# EAGLE board pcb (EAGLE 9.7.0)
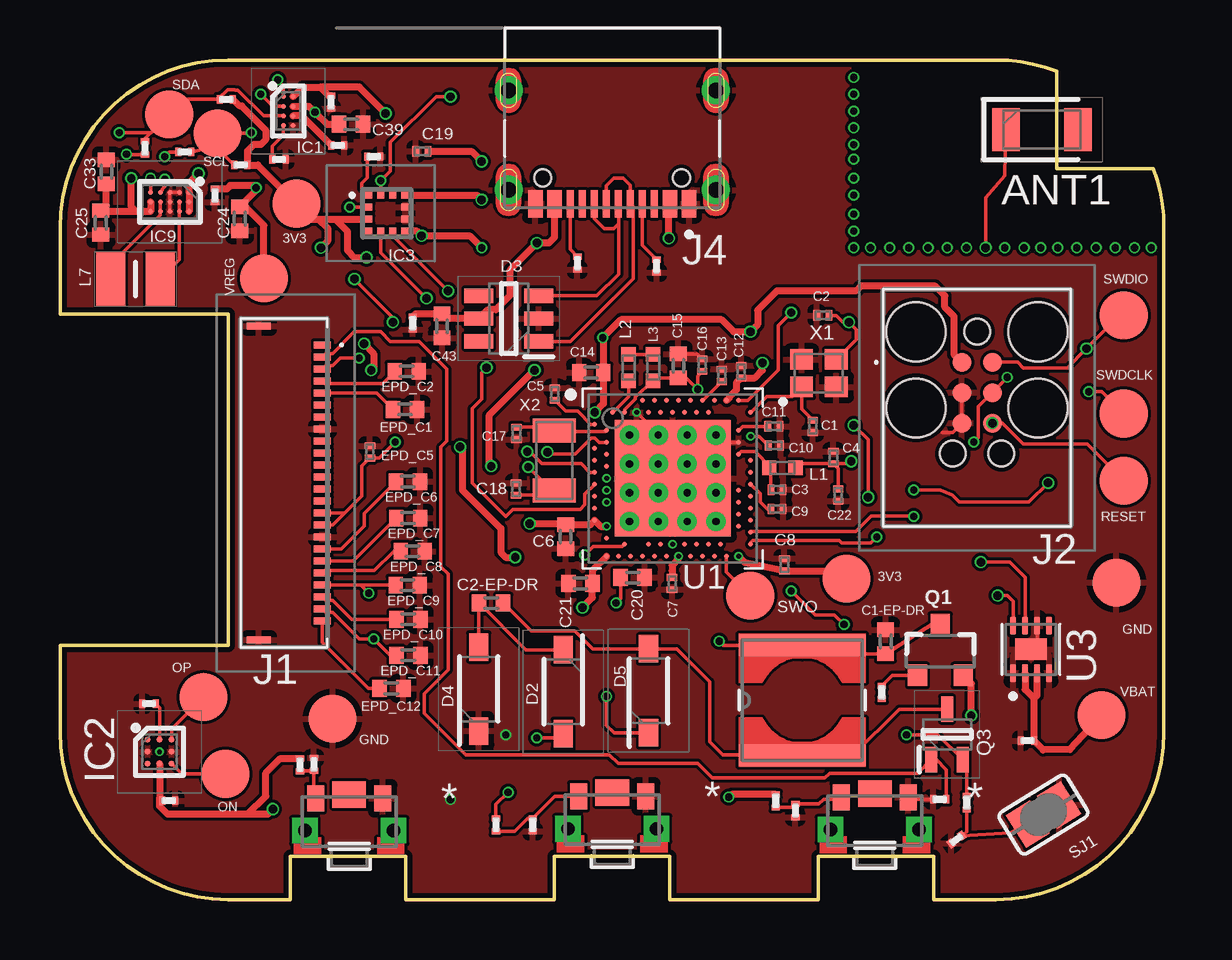
[diagram p0: board, top side]
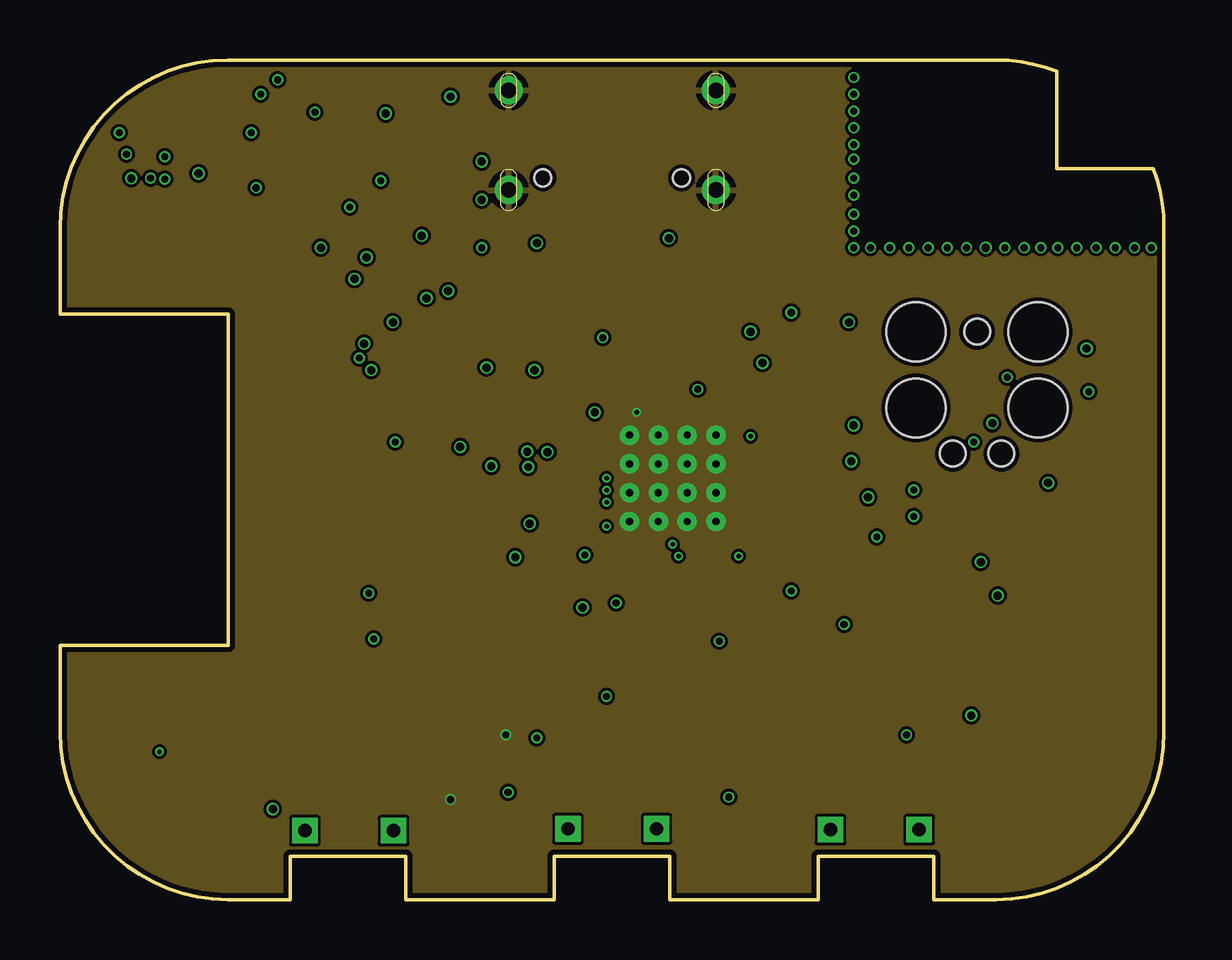
[diagram p1: board, inner layer Route2]
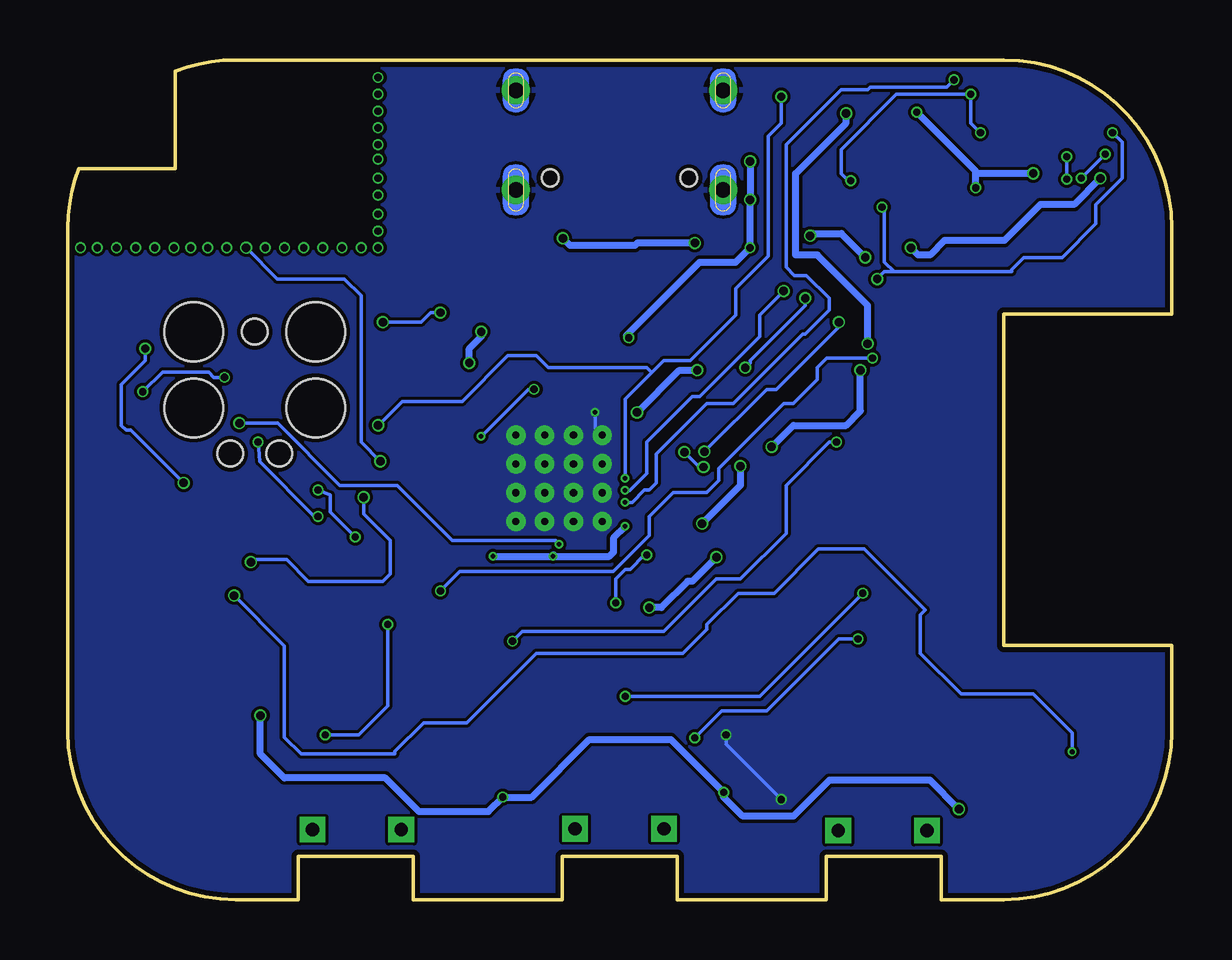
[diagram p2: board, bottom side, seen from below]

Size 46 x 35 mm. Coordinates in mm from the lower left corner, seen from the top.
Outline: 39,0 36.4,0 36.4,1.8 31.6,1.8 31.6,0 25.4,0 25.4,1.8 20.6,1.8 20.6,0 14.4,0 14.4,1.8 9.6,1.8 9.6,0 7,0 arc-90 0,7 0,10.6 7,10.6 7,24.4 0,24.4 0,28 arc-90 7,35 39,35 arc-21 41.52,34.53 41.52,30.47 45.55,30.48 arc-21 46,28 46,7 arc-90 39,0
Copper layers (1*16): Top 0.035mm / dielectric 1.6mm / Bottom 0.035mm
Design rules "jlcpcb-2layers.dru *": minimum track width 5mil, minimum drill 0.3mm, track to track 5mil, track to pad 5mil, pad to pad 5mil, via to via 5mil, smd to smd 5mil, copper to edge 0.2mm, drill to drill 6mil, minimum pad ring 10mil, minimum via ring 3mil, stop-mask expansion 4mil, vias tented up to drill 0mil, thermal gap 10mil
Net classes: 0 default: width 0.15 mm; 1 POWER: width 0.15 mm

## Footprints (pad centres in the part's own frame; a part is rotated, then mirrored left to right if it is on the bottom)
2450AT18B100E_ANTC3216X140N = smd 1.15 x 1.8: 1 -1.5,0; 2 1.5,0
NORDIC_NRF_3_RESC0201_L = smd 0.28 x 0.43: 1 -0.255,0; 2 0.255,0
PERFECT_0402_0402 = smd 0.6 x 0.7: 1 -0.5,0; 2 0.5,0
ERA-1AEB3401C_0201 = smd 0.35 x 0.25: 1 0,0.275; 2 0,-0.275
ESP32_C6_LIBRARY_5_SOD3716X135N = smd 1.15 x 0.8: 1 -1.75,0; 2 1.75,0
ESP32_C6_LIBRARY_3_SOT95P280X145-6N = smd 1.2 x 0.6: 1 -1.25,0.95; 2 -1.25,0; 3 -1.25,-0.95; 4 1.25,-0.95; 5 1.25,0; 6 1.25,0.95
BQ25180YBGR_BGA8C40P2X4_100X155X50 = smd 0.2 x 0.2: A1 -0.2,0.6; A2 0.2,0.6; B1 -0.2,0.2; B2 0.2,0.2; C1 -0.2,-0.2; C2 0.2,-0.2; D1 -0.2,-0.6; D2 0.2,-0.6
DRV2605YZFR_BGA9C50P3X3_144X144X62 = smd 0.25 x 0.25: A1 -0.5,0.5; A2 0,0.5; A3 0.5,0.5; B1 -0.5,0; B2 0,0; B3 0.5,0; C1 -0.5,-0.5; C2 0,-0.5; C3 0.5,-0.5
BMA423_BMA423 = smd 0.3 x 0.35: 1 -0.75,-0.775; 2 -0.25,-0.775; 3 0.25,-0.775; 4 0.75,-0.775; 7 0.75,0.775; 8 0.25,0.775; 9 -0.25,0.775; 10 -0.75,0.775 | smd 0.35 x 0.3: 5 0.775,-0.25; 6 0.775,0.25; 11 -0.775,0.25; 12 -0.775,-0.25
RT6160AWSC_BGA15C40P3X5_140X230X60 = smd 0.216 x 0.216: A1 -0.4,0.8; A2 0,0.8; A3 0.4,0.8; B1 -0.4,0.4; B2 0,0.4; B3 0.4,0.4; C1 -0.4,0; C2 0,0; C3 0.4,0; D1 -0.4,-0.4; D2 0,-0.4; D3 0.4,-0.4; E1 -0.4,-0.8; E2 0,-0.8; E3 0.4,-0.8
503480-2400_5034802400 = smd 0.3 x 0.7: 1 -5.75,1.525; 2 -5.25,1.525; 3 -4.75,1.525; 4 -4.25,1.525; 5 -3.75,1.525; 6 -3.25,1.525; 7 -2.75,1.525; 8 -2.25,1.525; 9 -1.75,1.525; 10 -1.25,1.525; 11 -0.75,1.525; 12 -0.25,1.525; 13 0.25,1.525; 14 0.75,1.525; 15 1.25,1.525; 16 1.75,1.525; 17 2.25,1.525; 18 2.75,1.525; 19 3.25,1.525; 20 3.75,1.525; 21 4.25,1.525; 22 4.75,1.525; 23 5.25,1.525; 24 5.75,1.525 | smd 0.3 x 1: MP1 -6.54,-1.125; MP2 6.54,-1.125
TC2030-IDC_TC2030IDC = smd 0.783 x 0.783: 1 -0.953,-0.635; 2 -0.953,0.635; 3 0.317,-0.635; 4 0.317,0.635; 5 1.588,-0.635; 6 1.588,0.635 | hole 2.451: -2.223,-2.54; -2.223,2.54; 0.952,-2.54; 0.952,2.54 | hole 1.067: -2.223,0; 2.857,-1.016; 2.857,1.016
KH-TYPE-C-16P_KINGHELM_KH-TYPE-C-16P = smd 0.6 x 1.15: A1_B12 -3.2,4.725; A4_B9 -2.4,4.725; A9_B4 2.4,4.725; A12_B1 3.2,4.725 | smd 0.3 x 1.15: A5 -1.25,4.725; A6 -0.25,4.725; A7 0.25,4.725; A8 1.25,4.725; B5 1.75,4.725; B6 0.75,4.725; B7 -0.75,4.725; B8 -1.75,4.725 | drill 0.65 pad 1.05: SH1 -4.32,0; SH2 4.32,0; SH3 -4.32,4.15; SH4 4.32,4.15 | hole 0.7: -2.89,3.65; 2.89,3.65
NORDIC_NRF_2_RESC0402_N = smd 0.6 x 0.6: 1 -0.55,0; 2 0.55,0
ESP32_C6_LIBRARY_2_IND_4828-WE-TPC_WRE = smd 0.9 x 5.3: 1 -2.286,0; 2 2.286,0
MLP2016SR47MT0S1_INDC2016X100N = smd 1.2 x 2.2: 1 -1.028,0; 2 1.028,0
ESP32_C6_LIBRARY_4_ESP32_C6_LIBRARY_4_ESP32_C6_LIBRARY_4_ESP32_C6_LIBRARY_4_ESP32_WROVER_SPARKFUN-DISCRETESEMI_SOT23-3 = smd 0.8 x 0.9: 1 -0.95,-1; 2 0.95,-1; 3 0,1.1
ESP32_C6_LIBRARY_6_SOT65P210X110-3N = smd 1.05 x 0.5: 1 -1.05,0.65; 2 -1.05,-0.65; 3 1.05,0
CPF0201D7K68C1_0201 = smd 0.35 x 0.25: 1 0,0.275; 2 0,-0.275
ESP32_C6_LIBRARY_7_JUMPER_SJ = smd 1.168 x 1.6: 1 -0.762,0; 2 0.762,0
2025-10-22_07-23-44_LIBRARY_SW_EVP-AKE31A_PAN = smd 0.711 x 1.092: 1 -1.4,-0.972; 2 1.4,-0.972 | drill 0.559 pad 0.914 square: 3 -1.848,0.381; 4 1.848,0.381 | smd 1.397 x 1.092: 5 0,-1.124
HECTOR_WATCH_1_TP20R = smd 2 x 2: TP 0,0
NORDIC_NRF_4_AQFN50P700X700X85_HS-74N = smd 4.85 x 4.85: P$74 0,0 | drill 0.3 pad 0.6: P$75 -1.8,1.8; P$76 -0.6,1.8; P$77 0.6,1.8; P$78 1.8,1.8; P$79 -1.8,0.6; P$80 -0.6,0.6; P$81 0.6,0.6; P$82 1.8,0.6; P$83 -1.8,-0.6; P$84 -0.6,-0.6; P$85 0.6,-0.6; P$86 1.8,-0.6; P$87 -1.8,-1.8; P$88 -0.6,-1.8; P$89 0.6,-1.8; P$90 1.8,-1.8 | smd 0.2 x 0.2: P$A8 -1.25,3.25; P$A10 -0.75,3.25; P$A12 -0.25,3.25; P$A14 0.25,3.25; P$A16 0.75,3.25; P$A18 1.25,3.25; P$A20 1.75,3.25; P$A22 2.25,3.25; P$A23 2.75,3.25; P$AA24 3.25,-2.25; P$AB2 -2.75,-2.5; P$AC5 -2,-2.75; P$AC9 -1,-2.75; P$AC11 -0.5,-2.75; P$AC13 0,-2.75; P$AC15 0.5,-2.75; P$AC17 1,-2.75; P$AC19 1.5,-2.75; P$AC21 2,-2.75; P$AC24 3.25,-2.75; P$AD2 -2.75,-3.25; P$AD4 -2.25,-3.25; P$AD6 -1.75,-3.25; P$AD8 -1.25,-3.25; P$AD10 -0.75,-3.25; P$AD12 -0.25,-3.25; P$AD14 0.25,-3.25; P$AD16 0.75,-3.25; P$AD18 1.25,-3.25; P$AD20 1.75,-3.25; P$AD22 2.25,-3.25; P$AD23 2.75,-3.25; P$B1 -3.25,2.75; P$B3 -2.5,2.75; P$B5 -2,2.75; P$B7 -1.5,2.75; P$B9 -1,2.75; P$B11 -0.5,2.75; P$B13 0,2.75; P$B15 0.5,2.75; P$B17 1,2.75; P$B19 1.5,2.75; P$B24 3.25,2.75; P$C1 -3.25,2.25; P$D2 -2.75,2; P$D23 2.75,2; P$E24 3.25,1.75; P$F2 -2.75,1.5; P$F23 2.75,1.5; P$G1 -3.25,1.25; P$H2 -2.75,1; P$H23 2.75,1; P$J1 -3.25,0.75; P$J24 3.25,0.75; P$K2 -2.75,0.5; P$L1 -3.25,0.25; P$L24 3.25,0.25; P$M2 -2.75,0; P$N1 -3.25,-0.25; P$N24 3.25,-0.25; P$P2 -2.75,-0.5; P$P23 2.75,-0.5; P$R1 -3.25,-0.75; P$R24 3.25,-0.75; P$T2 -2.75,-1; P$T23 2.75,-1; P$U1 -3.25,-1.25; P$U24 3.25,-1.25; P$V23 2.75,-1.5; P$W1 -3.25,-1.75; P$W24 3.25,-1.75; P$Y2 -2.75,-2; P$Y23 2.75,-2
ESP32_C6_LIBRARY_SON50P200X200X80-9N = smd 0.76 x 0.27: 1 -0.985,0.75; 2 -0.985,0.25; 3 -0.985,-0.25; 4 -0.985,-0.75; 5 0.985,-0.75; 6 0.985,-0.25; 7 0.985,0.25; 8 0.985,0.75 | smd 0.9 x 1.3: 9 0,0
NORDIC_NRF_BT-XTAL_2016_N = smd 0.95 x 0.85: 1 -0.725,-0.575; 2 0.725,-0.575; 3 0.725,0.575; 4 -0.725,0.575
NORDIC_NRF_1_XTAL_3215_N = smd 1 x 1.8: 1 -1.25,0; 2 1.25,0

## Placement (x,y rotation side)
ANT1  2450AT18B100E  [2450AT18B100E_ANTC3216X140N]  40.91,32.1 0 top
C1  12pF  [NORDIC_NRF_3_RESC0201_L]  31.37,19.73 270 top
C1-EP-DR  10uF  [PERFECT_0402_0402]  34.4,10.75 90 top
C2  12pF  [NORDIC_NRF_3_RESC0201_L]  31.79,24.35 180 top
C2-EP-DR  4.7uF/25V  [PERFECT_0402_0402]  17.96,12.36 0 top
C3  1pF  [NORDIC_NRF_3_RESC0201_L]  29.87,17.09 0 top
C4  1pF  [NORDIC_NRF_3_RESC0201_L]  32.23,18.43 90 top
C5  100nF  [NORDIC_NRF_3_RESC0201_L]  20.61,21.07 90 top
C6  4.7µF  [PERFECT_0402_0402]  21.07,15.13 270 top
C7  100nF  [NORDIC_NRF_3_RESC0201_L]  25.51,13.18 270 top
C8  100nF  [NORDIC_NRF_3_RESC0201_L]  30.18,13.95 90 top
C9  820pF  [NORDIC_NRF_3_RESC0201_L]  29.87,16.28 0 top
C10  N.C.  [NORDIC_NRF_3_RESC0201_L]  29.77,18.93 0 top
C11  100pF  [NORDIC_NRF_3_RESC0201_L]  29.74,19.73 0 top
C12  100nF  [NORDIC_NRF_3_RESC0201_L]  28.38,22 90 top
C13  N.C.  [NORDIC_NRF_3_RESC0201_L]  27.57,21.85 90 top
C14  4.7µF  [PERFECT_0402_0402]  22.14,21.97 180 top
C15  1.0µF  [PERFECT_0402_0402]  25.76,22.24 90 top
C16  47nF  [NORDIC_NRF_3_RESC0201_L]  26.76,22.28 90 top
C17  12pF  [NORDIC_NRF_3_RESC0201_L]  19.02,19.43 90 top
C18  12pF  [NORDIC_NRF_3_RESC0201_L]  19,17.11 270 top
C19  100nF  [NORDIC_NRF_3_RESC0201_L]  15.08,31.19 180 top
C20  4.7µF  [PERFECT_0402_0402]  23.86,13.42 0 top
C21  4.7µF  [PERFECT_0402_0402]  21.69,13.18 180 top
C22  N.C  [NORDIC_NRF_3_RESC0201_L]  32.43,16.86 270 top
C23  0.1uF  [ERA-1AEB3401C_0201]  6.45,29.36 180 top
C24  10uF  [PERFECT_0402_0402]  7.49,28.38 90 top
C25  22uF  [PERFECT_0402_0402]  1.7,28.22 270 top
C27  0.1uF  [ERA-1AEB3401C_0201]  40.31,6.62 90 top
C29  1uF  [ERA-1AEB3401C_0201]  10.58,5.63 0 top
C30  1uF  [ERA-1AEB3401C_0201]  19.7,3.11 180 top
C31  1uF  [ERA-1AEB3401C_0201]  30.64,3.71 180 top
C32  1uF  [ERA-1AEB3401C_0201]  3.71,8.16 90 top
C33  22uF  [PERFECT_0402_0402]  1.93,30.34 90 top
C34  0.1uF  [ERA-1AEB3401C_0201]  4.53,4.12 270 top
C37  1uF  [ERA-1AEB3401C_0201]  11.57,31.44 270 top
C38  1uF  [ERA-1AEB3401C_0201]  11.29,33.24 180 top
C39  10uF  [PERFECT_0402_0402]  12.13,32.32 0 top
C42  0.1uF  [ERA-1AEB3401C_0201]  14.7,24.03 0 top
C43  4.7uF  [PERFECT_0402_0402]  15.92,23.91 270 top
D2  MBR0530  [ESP32_C6_LIBRARY_5_SOD3716X135N]  20.96,8.67 270 top
D3  USBLC6-2SC6Y  [ESP32_C6_LIBRARY_3_SOT95P280X145-6N]  18.7,24.22 180 top
D4  MBR0530  [ESP32_C6_LIBRARY_5_SOD3716X135N]  17.45,8.77 90 top
D5  MBR0530  [ESP32_C6_LIBRARY_5_SOD3716X135N]  24.52,8.7 90 top
EPD_C1  1uF/50V  [PERFECT_0402_0402]  14.38,20.43 180 top
EPD_C2  1uF/50V  [PERFECT_0402_0402]  14.45,22.02 180 top
EPD_C5  0.1uF/50V  [NORDIC_NRF_3_RESC0201_L]  12.91,18.66 270 top
EPD_C6  1uF/50V  [PERFECT_0402_0402]  14.5,17.42 180 top
EPD_C7  1uF/50V  [PERFECT_0402_0402]  14.51,15.9 180 top
EPD_C8  1uF/50V  [PERFECT_0402_0402]  14.7,14.52 180 top
EPD_C9  1uF/50V  [PERFECT_0402_0402]  14.49,13.1 180 top
EPD_C10  1uF/50V  [PERFECT_0402_0402]  14.52,11.68 180 top
EPD_C11  1uF/50V  [PERFECT_0402_0402]  14.52,10.18 180 top
EPD_C12  1uF/50V  [PERFECT_0402_0402]  13.81,8.8 180 top
IC1  BQ25180YBGR  [BQ25180YBGR_BGA8C40P2X4_100X155X50]  9.51,32.87 0 top
IC2  DRV2605YZFR  [DRV2605YZFR_BGA9C50P3X3_144X144X62]  4.15,6.16 0 top
IC3  BMA423  [BMA423_BMA423]  13.62,28.61 270 top
IC9  RT6160AWSC  [RT6160AWSC_BGA15C40P3X5_140X230X60]  4.58,29.09 270 top
J1  503480-2400  [503480-2400_5034802400]  9.41,17.37 270 top
J2  TC2030-IDC  [TC2030-IDC_TC2030IDC]  38.21,21.44 270 top
J4  KH-TYPE-C-16P  [KH-TYPE-C-16P_KINGHELM_KH-TYPE-C-16P]  23.01,33.73 180 top
L1  3.9nH  [NORDIC_NRF_2_RESC0402_N]  30.1,18 0 top
L2  10µH  [NORDIC_NRF_2_RESC0402_N]  23.7,22.17 90 top
L3  15nH  [NORDIC_NRF_2_RESC0402_N]  24.71,22.17 270 top
L5  68uH  [ESP32_C6_LIBRARY_2_IND_4828-WE-TPC_WRE]  30.93,8.31 90 top
L7  MLP2016SR47MT0S1  [MLP2016SR47MT0S1_INDC2016X100N]  3.15,25.87 180 top
Q1  20V/4.2A/52mΩ/1.4W  [ESP32_C6_LIBRARY_4_ESP32_C6_LIBRARY_4_ESP32_C6_LIBRARY_4_ESP32_C6_LIBRARY_4_ESP32_WROVER_SPARKFUN-DISCRETESEMI_SOT23-3]  36.68,10.35 0 top
Q3  SI1308EDL-T1-GE3  [ESP32_C6_LIBRARY_6_SOT65P210X110-3N]  36.96,6.89 90 top
R1_EP_DR  0.47  [CPF0201D7K68C1_0201]  37.78,4.04 180 top
R1_USB  5K1  [CPF0201D7K68C1_0201]  24.86,26.41 180 top
R2  0  [ERA-1AEB3401C_0201]  3.54,31.33 0 top
R2_EP_DR  10K  [CPF0201D7K68C1_0201]  36.65,4.18 90 top
R2_USB  5K1  [CPF0201D7K68C1_0201]  21.56,26.53 0 top
R3  0  [CPF0201D7K68C1_0201]  13.07,30.97 270 top
R4  0  [ERA-1AEB3401C_0201]  5.2,31.16 270 top
R5  10k  [CPF0201D7K68C1_0201]  18.16,3.11 180 top
R7  10K  [CPF0201D7K68C1_0201]  10,5.61 180 top
R8  10K  [CPF0201D7K68C1_0201]  29.82,4.11 180 top
R9  10k  [ERA-1AEB3401C_0201]  9.13,30.85 270 top
R17  3K3  [ERA-1AEB3401C_0201]  7.53,30.62 270 top
R18  3K3  [ERA-1AEB3401C_0201]  6.93,33.36 270 top
R_PWR_EPD  10K  [CPF0201D7K68C1_0201]  34.24,8.63 0 top
R_TYPE_SEL  2.2  [CPF0201D7K68C1_0201]  37.35,2.5 126.9 top
SJ1  [ESP32_C6_LIBRARY_7_JUMPER_SJ]  40.98,3.54 211.8 top
SW_DN  2025-10-22_07-23-44_LIBRARY_EVP-AKE31ASW_EVP-AKE31A_PAN  [2025-10-22_07-23-44_LIBRARY_SW_EVP-AKE31A_PAN]  12.05,3.25 180 top
SW_ENT  2025-10-22_07-23-44_LIBRARY_EVP-AKE31ASW_EVP-AKE31A_PAN  [2025-10-22_07-23-44_LIBRARY_SW_EVP-AKE31A_PAN]  33.95,3.29 180 top
SW_UP  2025-10-22_07-23-44_LIBRARY_EVP-AKE31ASW_EVP-AKE31A_PAN  [2025-10-22_07-23-44_LIBRARY_SW_EVP-AKE31A_PAN]  23.01,3.33 180 top
TP_3.3V  HECTOR_WATCH_1_TPTP20R  [HECTOR_WATCH_1_TP20R]  32.78,13.37 90 top
TP_3V3  HECTOR_WATCH_1_TPTP20R  [HECTOR_WATCH_1_TP20R]  9.85,29.01 0 top
TP_BAT_GND  HECTOR_WATCH_1_TPTP20R  [HECTOR_WATCH_1_TP20R]  44.02,13.21 90 top
TP_GND  HECTOR_WATCH_1_TPTP20R  [HECTOR_WATCH_1_TP20R]  11.36,7.54 0 top
TP_ON  HECTOR_WATCH_1_TPTP20R  [HECTOR_WATCH_1_TP20R]  6.9,5.24 0 top
TP_OP  HECTOR_WATCH_1_TPTP20R  [HECTOR_WATCH_1_TP20R]  5.98,8.44 0 top
TP_RESET  HECTOR_WATCH_1_TPTP20R  [HECTOR_WATCH_1_TP20R]  44.32,17.46 0 top
TP_SCL  HECTOR_WATCH_1_TPTP20R  [HECTOR_WATCH_1_TP20R]  6.56,31.94 0 top
TP_SDA  HECTOR_WATCH_1_TPTP20R  [HECTOR_WATCH_1_TP20R]  4.55,32.72 0 top
TP_SWDCLK  HECTOR_WATCH_1_TPTP20R  [HECTOR_WATCH_1_TP20R]  44.32,20.26 0 top
TP_SWDIO  HECTOR_WATCH_1_TPTP20R  [HECTOR_WATCH_1_TP20R]  44.32,24.36 0 top
TP_SWO  HECTOR_WATCH_1_TPTP20R  [HECTOR_WATCH_1_TP20R]  28.76,12.66 0 top
TP_VBAT  HECTOR_WATCH_1_TPTP20R  [HECTOR_WATCH_1_TP20R]  43.39,7.68 180 top
TP_VREG  HECTOR_WATCH_1_TPTP20R  [HECTOR_WATCH_1_TP20R]  8.5,25.91 0 top
U1  NRF52840_QF  [NORDIC_NRF_4_AQFN50P700X700X85_HS-74N]  25.53,17.56 0 top
U3  MAX17048G+T10  [ESP32_C6_LIBRARY_SON50P200X200X80-9N]  40.46,10.43 90 top
X1  32MHz  [NORDIC_NRF_BT-XTAL_2016_N]  31.62,21.94 0 top
X2  32.768kHz  [NORDIC_NRF_1_XTAL_3215_N]  20.59,18.3 270 top

## Library data of the parts
ANT1 = InkTime_v5; ARROW_PART_NUMBER: 2450AT18B100E; ARROW_PRICE-STOCK: https://www.arrow.com/en/products/2450at18b100e/johanson-dielectrics?utm_currency=USD&region=nac; DESCRIPTION: Antennas 2.45GHz ANTENNA; HEIGHT: 1.4mm; MANUFACTURER_NAME: JOHANSON TECHNOLOGY; MANUFACTURER_PART_NUMBER: 2450AT18B100E; MOUSER_PART_NUMBER: 609-2450AT18B100E; MOUSER_PRICE-STOCK: https://www.mouser.co.uk/ProductDetail/Johanson-Technology/2450AT18B100E?qs=yCnrNFeXz%252Bh5MFsFIXGZGA%3D%3D
C1 C1-EP-DR C2 C2-EP-DR C3-C25 C27 C29-C34 C37-C39 C42 C43 EPD_C1 EPD_C2 EPD_C5-EPD_C12 L1-L3 R1_EP_DR R1_USB R2 R2_EP_DR R2_USB R3-R5 R7-R9 R17 R18 R_PWR_EPD R_TYPE_SEL SJ1 TP_3.3V TP_3V3 TP_BAT_GND TP_GND TP_ON TP_OP TP_RESET TP_SCL TP_SDA TP_SWDCLK TP_SWDIO TP_SWO TP_VBAT TP_VREG U1 X1 X2 = InkTime_v5
D2 D4 D5 = InkTime_v5; AVAILABILITY: In Stock; CHECK_PRICES: https://www.snapeda.com/parts/MBR0530/Onsemi/view-part/?ref=eda; DESCRIPTION: Diode Schottky 30 V 500mA Surface Mount SOD-123; MF: ON Semiconductor; MP: MBR0530; PACKAGE: SOD-123-2 ON Semiconductor; PRICE: None; PURCHASE-URL: https://www.snapeda.com/api/url_track_click_mouser/?unipart_id=179458&manufacturer=ON Semiconductor&part_name=MBR0530&search_term=None; SNAPEDA_LINK: https://www.snapeda.com/parts/MBR0530/Onsemi/view-part/?ref=snap
D3 = InkTime_v5; AVAILABILITY: In Stock; CHECK_PRICES: https://www.snapeda.com/parts/USBLC6-2SC6Y/STMicroelectronics/view-part/?ref=eda; DESCRIPTION: 17V Clamp 5A (8/20µs) Ipp Tvs Diode Surface Mount SOT-23-6; MF: STMicroelectronics; MP: USBLC6-2SC6Y; PACKAGE: SOT-23-6 STMicroelectronics; PRICE: None; SNAPEDA_LINK: https://www.snapeda.com/parts/USBLC6-2SC6Y/STMicroelectronics/view-part/?ref=snap
IC1 = InkTime_v5; ARROW_PART_NUMBER: BQ25180YBGR; ARROW_PRICE-STOCK: https://www.arrow.com/en/products/bq25180ybgr/texas-instruments?utm_currency=USD&region=nac; DESCRIPTION: Charger IC Lithium Ion/Polymer, Lithium Iron Phosphate 8-DSBGA (1.6x1.1); HEIGHT: 0.5mm; MANUFACTURER_NAME: Texas Instruments; MANUFACTURER_PART_NUMBER: BQ25180YBGR; MOUSER_PART_NUMBER: 595-BQ25180YBGR; MOUSER_PRICE-STOCK: https://www.mouser.co.uk/ProductDetail/Texas-Instruments/BQ25180YBGR?qs=doiCPypUmgEWjAK%252BJAX6Tw%3D%3D
IC2 = InkTime_v5; ARROW_PART_NUMBER: DRV2605YZFR; ARROW_PRICE-STOCK: https://www.arrow.com/en/products/drv2605yzfr/texas-instruments?region=nac; DESCRIPTION: Haptic Driver for ERM/LRA with Built-In Library and Smart Loop Architecture; HEIGHT: 0.625mm; MANUFACTURER_NAME: Texas Instruments; MANUFACTURER_PART_NUMBER: DRV2605YZFR
IC3 = InkTime_v5; ARROW_PART_NUMBER: BMA423; ARROW_PRICE-STOCK: https://www.arrow.com/en/products/bma423/bosch; DESCRIPTION: Accelerometers Triaxial low-g 12bit Acceleration Sensor; HEIGHT: 1mm; MANUFACTURER_NAME: BOSCH; MANUFACTURER_PART_NUMBER: BMA423; MOUSER_PART_NUMBER: 262-BMA423; MOUSER_PRICE-STOCK: https://www.mouser.co.uk/ProductDetail/Bosch-Sensortec/BMA423?qs=HXFqYaX1Q2xC%252BSgeGoX3mg%3D%3D
IC9 = InkTime_v5; DESCRIPTION: Buck-Boost Regulator Positive Output Step-Up/Step-Down I2C DC-DC Controller IC 15-WL-CSP (BSC) (1.4x2.3); HEIGHT: 0.6mm; MANUFACTURER_NAME: RICHTEK; MANUFACTURER_PART_NUMBER: RT6160AWSC; MOUSER_PART_NUMBER: 835-RT6160AWSC; MOUSER_PRICE-STOCK: https://www.mouser.co.uk/ProductDetail/Richtek/RT6160AWSC?qs=amGC7iS6iy%2FLd9PSoixZXQ%3D%3D
J1 = InkTime_v5; DESCRIPTION: FFC & FPC Connectors 0.5mm FPC RA SMT Dual Contact 24Ckt; HEIGHT: 1.87mm; MANUFACTURER_NAME: Molex; MANUFACTURER_PART_NUMBER: 503480-2400; MOUSER_PART_NUMBER: 538-503480-2400; MOUSER_PRICE-STOCK: https://www.mouser.co.uk/ProductDetail/Molex/503480-2400?qs=OAhjpuo3Vu7efIoxFh9AOw%3D%3D
J2 = InkTime_v5; DESCRIPTION: CABLE ADAPTER 6 POS; HEIGHT: 19mm; MANUFACTURER_NAME: Tag Connect; MANUFACTURER_PART_NUMBER: TC2030-IDC
J4 = InkTime_v5; AVAILABILITY: Not in stock; CHECK_PRICES: https://www.snapeda.com/parts/KH-TYPE-C-16P/Kinghelm/view-part/?ref=eda; MF: kinghelm; MP: KH-TYPE-C-16P; PACKAGE: None; PRICE: None; SNAPEDA_LINK: https://www.snapeda.com/parts/KH-TYPE-C-16P/Kinghelm/view-part/?ref=snap
L5 = InkTime_v5; COPYRIGHT: Copyright (C) 2024 Ultra Librarian. All rights reserved.; MANUFACTURER_PART_NUMBER: 744043680; MFR_NAME: Wurth Electronics
L7 = InkTime_v5; DESCRIPTION: SMD / SMT Inductors (Coils), L=0.47?H, L x W x T :; HEIGHT: 1mm; JLCPCB: https://jlcpcb.com/partdetail/6763488-FTC252012SR47MBCA/C5832368; MANUFACTURER_NAME: TDK; MANUFACTURER_PART_NUMBER: FTC252012SR47MBCA
Q1 = InkTime_v5; PROD_ID: TRAN-14388
Q3 = InkTime_v5; AVAILABILITY: In Stock; CHECK_PRICES: https://www.snapeda.com/parts/SI1308EDL-T1-GE3/Vishay+Siliconix/view-part/?ref=eda; DESCRIPTION: Si1308EDL-T1-GE3 N-channel MOSFET Transistor, 1.5 A, 30 V, 3-Pin SC-70 | Siliconix / Vishay SI1308EDL-T1-GE3; MF: Vishay Siliconix; MP: SI1308EDL-T1-GE3; PACKAGE: SOT-323 Vishay Semiconductor; PRICE: None; PURCHASE-URL: https://www.snapeda.com/api/url_track_click_mouser/?unipart_id=274603&manufacturer=Vishay Siliconix&part_name=SI1308EDL-T1-GE3&search_term=None; SNAPEDA_LINK: https://www.snapeda.com/parts/SI1308EDL-T1-GE3/Vishay+Siliconix/view-part/?ref=snap
SW_DN SW_ENT SW_UP = InkTime_v5; COPYRIGHT: Copyright (C) 2025 Ultra Librarian. All rights reserved.; DIGI-KEY_PART_NUMBER_1: P123437TR-ND; DIGI-KEY_PART_NUMBER_2: P123437CT-ND; DIGI-KEY_PART_NUMBER_3: P123437DKR-ND; MANUFACTURER_NAME: Panasonic; MANUFACTURER_PART_NUMBER: EVP-AKE31A
U3 = InkTime_v5; AVAILABILITY: In Stock; CHECK_PRICES: https://www.snapeda.com/parts/MAX17048G+T10/Analog+Devices/view-part/?ref=eda; DESCRIPTION: 3µA 1-Cell/2-Cell Fuel Gauge with ModelGauge; MF: Analog Devices; MP: MAX17048G+T10; PACKAGE: TDFN-8 Maxim; PRICE: None; PURCHASE-URL: https://www.snapeda.com/api/url_track_click_mouser/?unipart_id=329239&manufacturer=Analog Devices&part_name=MAX17048G+T10&search_term=None; SNAPEDA_LINK: https://www.snapeda.com/parts/MAX17048G+T10/Analog+Devices/view-part/?ref=snap

## Nets
3V3/1.7D [POWER]: C34.2 IC2.C2 Q1.2 R5.2 R7.2 R8.2
3V3/2.4A [POWER]: C6.1 C7.1 C8.1 C12.1 C14.1 C19.1 C25.1 C33.1 IC3.3 IC3.7 IC3.10 IC9.E2 IC9.E3 J2.1 R17.1 R18.1 TP_3.3V.TP TP_3V3.TP U1.P$A22 U1.P$AD14 U1.P$AD23 U1.P$B1 U1.P$W1 U1.P$Y2
ALERT/1.6C: U3.5
D+/1.5D: D3.4
D+/2.7D: U1.P$AD6
D-/1.5D: D3.6
D-/2.7D: U1.P$AD4
DEC1: C5.1 U1.P$C1
DEC3: C11.1 U1.P$D23
DEC4_6: C10.1 C15.1 C16.1 L3.2 U1.P$B5 U1.P$E24
DN: D3.1 J4.A7 J4.B7
DP: D3.3 J4.A6 J4.B6
EPD_3V3: C1-EP-DR.1 EPD_C5.2 J1.15 J1.16 L5.2 Q1.3
EPD_BUSY/1.5D: J1.9
EPD_BUSY/2.2D: U1.P$AD12
EPD_CS/1.4C: J1.12
EPD_CS/2.2D: U1.P$K2
EPD_DC/1.5D: J1.11
EPD_DC/2.2D: U1.P$AD10
EPD_RST/1.5D: J1.10
EPD_RST/2.2D: U1.P$AC11
GDR: J1.2 Q3.1 R2_EP_DR.2
GND: C1-EP-DR.2 C1.2 C2.2 C3.2 C4.2 C5.2 C6.2 C7.2 C8.2 C9.2 C10.2 C11.2 C12.2 C13.2 C14.2 C15.2 C16.2 C17.1 C18.1 C19.2 C20.2 C21.2 C22.2 C23.1 C24.1 C25.2 C27.1 C29.1 C30.1 C31.1 C32.1 C33.2 C34.1 C37.1 C38.1 C39.2 C42.2 C43.2 D3.2 D4.1 EPD_C1.1 EPD_C2.1 EPD_C5.1 EPD_C6.1 EPD_C7.1 EPD_C8.1 EPD_C9.1 EPD_C10.1 EPD_C11.1 EPD_C12.1 IC1.D2 IC2.B1 IC2.B3 IC3.8 IC3.9 IC9.B1 IC9.C1 IC9.C2 IC9.C3 J1.8 J1.17 J1.MP1 J1.MP2 J2.3 J2.5 J4.A1_B12 J4.A12_B1 J4.SH1 J4.SH2 J4.SH3 J4.SH4 R1_USB.1 R2_EP_DR.1 R2_USB.2 R3.1 R9.1 R_TYPE_SEL.1 SJ1.1 SW_DN.1 SW_ENT.1 SW_UP.1 TP_BAT_GND.TP TP_GND.TP U1.P$74 U1.P$75 U1.P$76 U1.P$77 U1.P$78 U1.P$79 U1.P$80 U1.P$81 U1.P$82 U1.P$83 U1.P$84 U1.P$85 U1.P$86 U1.P$87 U1.P$88 U1.P$89 U1.P$90 U1.P$B7 U1.P$F23 U3.1 U3.4 U3.6 U3.9 X1.2 X1.4
HAPTIC_EN/1.4C: IC2.A1
HAPTIC_EN/2.6A: U1.P$U1
IMU_INT1: IC3.5 U1.P$N1
IMU_INT2: IC3.6 U1.P$P2
LX1: IC9.B2 IC9.B3 L7.1
LX2: IC9.D2 IC9.D3 L7.2
MOSI/1.5B: J1.14
MOSI/2.2D: U1.P$B13
N$1: IC9.D1 R4.2
N$2: IC1.D1 R9.2
N$3: IC9.E1 R2.2
N$4: C18.2 U1.P$F2 X2.2
N$5: C17.2 U1.P$D2 X2.1
N$6: C2.1 U1.P$A23 X1.3
N$7: C1.1 U1.P$B24 X1.1
N$8: L2.2 L3.1
N$9: C2-EP-DR.1 D2.1 D4.2
N$10: C2-EP-DR.2 D5.2 L5.1 Q3.3
N$11: C3.1 L1.1 U1.P$H23
N$12: U1.P$J24
N$13: U1.P$L24
N$14: C9.1 U1.P$N24
N$15: EPD_C2.2 J1.4
N$16: ANT1.1 C4.1 C22.1 L1.2
N$17: C13.1 U1.P$A18
N$18: EPD_C1.2 J1.5
N$19: C32.2 IC2.A2
N$20: C20.1 U1.P$AC5
N$21: J4.A5 R1_USB.2
N$22: R1_EP_DR.1 R_TYPE_SEL.2 SJ1.2
N$24: R_PWR_EPD.2
N$26: J4.B5 R2_USB.1
N$30: EPD_C6.2 J1.18
N$31: L2.1 U1.P$B3
N$32: EPD_C7.2 J1.19
N$33: EPD_C8.2 J1.20
N$35: EPD_C10.2 J1.22
N$37: EPD_C12.2 J1.24
OUT+: IC2.A3 TP_OP.TP
OUT-: IC2.C3 TP_ON.TP
P0.04: U1.P$J1
P0.13/1.5D: C30.2 R5.1 SW_UP.2
P0.13/2.6C: U1.P$AD8
P0.14/1.5D: C31.2 R8.1 SW_ENT.2
P0.14/2.7C: U1.P$AC9
P0.19: U1.P$AC15
P0.20: U1.P$AD16
P0.21: U1.P$AC17
P0.22: U1.P$AD18
P0.23: U1.P$AC19
P0.24: U1.P$AD20
P0.25: U1.P$AC21
P0.26: U1.P$G1
P0.27: U1.P$H2
P0.28: U1.P$B11
P0.29: U1.P$A10
P0.30: U1.P$B9
P0.31: U1.P$A8
P1.01/1.6C: Q1.1 R_PWR_EPD.1
P1.01/2.4B: U1.P$Y23
P1.02/1.6C: C29.2 R7.1 SW_DN.2
P1.02/2.8C: U1.P$W24
P1.03: U1.P$V23
P1.04: U1.P$U24
P1.05: U1.P$T23
P1.06: U1.P$R24
P1.07: U1.P$P23
P1.09: U1.P$R1
P1.10: U1.P$A20
P1.11: U1.P$B19
P1.12: U1.P$B17
P1.13: U1.P$A16
P1.14: U1.P$B15
P1.15: U1.P$A14
PMIC_INT: IC1.A1 U1.P$T2
PREVGH: D5.1 EPD_C9.2 J1.21
PREVGL: D2.2 EPD_C11.2 J1.23
RESE: J1.3 Q3.2 R1_EP_DR.2
RESET: J2.6 TP_RESET.TP U1.P$AC13
SCK/1.5B: J1.13
SCK/2.2D: U1.P$A12
SCL/1.4C: IC2.C1
SCL/2.4C: IC1.B1 IC3.12 R4.1 R17.2 TP_SCL.TP U1.P$M2 U3.7
SCL/2.4C1: IC3.1 R3.2
SDA/1.4C: IC2.B2 U3.8
SDA/2.4C: IC1.C1 IC3.2 R2.1 R18.2 TP_SDA.TP U1.P$L1
SWDCLK: J2.4 TP_SWDCLK.TP U1.P$AA24
SWDIO: J2.2 TP_SWDIO.TP U1.P$AC24
SWO: TP_SWO.TP U1.P$AD22
VBAT/1.2A [POWER]: C27.2 TP_VBAT.TP U3.2 U3.3
VBAT/2.5C [POWER]: C37.2 IC1.C2
VBUS/1.5D [POWER]: C42.1 C43.1 D3.5 J4.A4_B9 J4.A9_B4
VBUS/2.6D [POWER]: C21.1 C38.2 IC1.A2 U1.P$AD2
VREG [POWER]: C23.2 C24.2 C39.1 IC1.B2 IC9.A1 IC9.A2 IC9.A3 TP_VREG.TP

## Tracks (layer width: path | path; a pad name or v marks a point on that pad's centre or on a via)
3V3/1.7D  (via drill 0.3, 0.35 pad 0.2, 0.35 pad 0.3)
  Top 0.15: v18.67,4.47 18.16,3.96 R5.2
  Top 0.3: IC2.C2 4.15,4.23 | 4.15,4.23 C34.2 | R7.2 9.18,5.89 8.58,5.28 8.58,4.31 7.83,3.56 | 7.83,3.56 6.77,3.56 6.76,3.57 4.47,3.57 4.15,3.89 4.15,4.23 | R8.2 27.98,4.39 v27.87,4.27 | v37.97,7.67 37.97,9.01 Q1.2 | 7.83,3.56 8.66,3.56 v8.87,3.77
  Bottom 0.3: v37.97,7.67 37.97,6.07 36.97,5.07 32.77,5.07 31.37,3.67 28.47,3.67 v27.87,4.27 26.67,4.27 24.27,6.67 20.87,6.67 v18.67,4.47 18.67,4.27 17.87,3.47 15.77,3.47 14.27,4.97 10.07,4.97 v8.87,3.77
3V3/2.4A  (via drill 0.2 pad 0.2, 0.3, 0.35 pad 0.2, 0.35 pad 0.3)
  Top 0.3: C33.1 1.93,28.94 C25.1 1.74,28.69 3.17,28.69 | 3.17,28.69 IC9.E3 IC9.E2 | J2.1 37.25,22.73 37.25,24.32 36.87,24.7 36.87,25.17 36.47,25.57 33.37,25.57 33.17,25.37 29.87,25.37 29.07,24.57 29.07,23.97 v28.77,23.67 28.07,23.67 27.57,24.17 23.37,24.17 v22.62,23.42 22.64,23.4 C14.1 22.64,20.67 U1.P$B1 | R18.1 7.49,33.07 7.58,33.07 8.57,32.08 8.57,31.67 8.37,31.47 8.07,31.47 7.8,31.21 R17.1 8.24,30.62 TP_3V3.TP 10.5,28.36 10.77,28.36 | U1.P$A22 27.9,20.93 27.9,20.97 28.18,21.25 28.18,21.55 C12.1 28.95,21.75 29.27,22.07 v29.27,22.37 | U1.P$Y2 22.53,15.56 U1.P$W1 22.1,15.63 C6.1 21.03,15.67 v19.57,15.67 | 10.77,28.36 11.47,28.36 | 11.47,28.36 IC3.3 | U1.P$AD23 28.56,14.03 C8.1 32.45,13.7 TP_3.3V.TP | C7.1 25.5,13.7 25.5,13.94 25.78,14.21 U1.P$AD14 | v19.77,22.07 17.87,20.17 17.87,18.17 v17.97,18.07 | 11.47,28.36 11.97,27.86 11.97,27.07 12.27,26.77 v12.77,26.77 | IC3.7 14.88,27.86 v15.07,27.67 17.07,27.67 v17.57,27.17 | 3.17,28.69 2.97,28.88 v2.97,30.07 | v10.87,27.17 11.17,27.47 11.17,27.96 10.77,28.36 | C19.1 17.15,31.19 v17.57,30.77 | IC3.10 17.38,29.36 v17.57,29.17
  Bottom 0.3: v22.62,23.42 22.72,23.52 19.67,26.57 18.17,26.57 v17.57,27.17 v17.57,29.17 v17.57,30.77 | U1.P$B1 20.52,22.07 v19.77,22.07 | v17.97,18.07 17.97,17.27 v19.57,15.67 | U1.P$AD23 25.83,14.31 25.77,14.37 U1.P$AD14 23.43,14.31 23.27,14.47 23.27,15.07 U1.P$Y2 | v29.27,22.37 29.27,22.97 28.77,23.47 v28.77,23.67 | v12.77,26.77 13.77,27.77 14.97,27.77 v15.07,27.67 | v2.97,30.07 4.07,28.97 5.47,28.97 6.97,27.47 9.47,27.47 10.07,26.87 10.57,26.87 v10.87,27.17
  other vias: 22.28,20.31 28.28,14.31 25.78,14.31 22.78,15.56
DEC1
  Top 0.15: U1.P$C1 22.12,19.81 21.57,20.36 21.07,20.36 C5.1
DEC3
  Top 0.15: U1.P$D23 28.45,19.73 C11.1
DEC4_6  (via drill 0.2 pad 0.2, 0.3 pad 0.2)
  Top 0.15: U1.P$B5 23.53,20.42 23.97,20.86 23.97,20.94 L3.2 24.78,21.74 C15.1 26.1,21.74 v26.57,21.27 26.57,21.83 C16.1 | U1.P$E24 29.13,19.31 C10.1
  Bottom 0.15: U1.P$E24 26.82,21.27 v26.57,21.27
  other vias: 28.78,19.31
DN
  Top 0.15: D3.1 21.27,23.27 23.88,25.88 23.88,28.88 J4.B7 23.76,29.78 23.47,30.07 23.07,30.07 22.76,29.76 J4.A7
DP
  Top 0.15: 23.28,28.17 23.28,26.08 22.37,25.17 D3.3 | 23.28,28.17 23.28,28.99 J4.A6 | J4.B6 22.26,28.38 22.67,27.97 23.08,27.97 23.28,28.17
EPD_3V3  (via drill 0.3)
  Top 0.15: J1.15 11.87,16.12 | v27.47,10.77 27.64,10.6 L5.2 31.27,10.25 C1-EP-DR.1 36.68,11.69 Q1.3 | J1.16 11.37,15.62 11.87,16.12 | 11.87,16.12 12.57,16.82 12.57,18.06 EPD_C5.2 13.3,18.41 v13.97,19.07
  Bottom 0.15: v27.47,10.77 27.07,11.17 21.17,11.17 18.97,13.37 17.97,13.37 16.07,15.27 16.07,17.27 14.27,19.07 v13.97,19.07
GDR
  Top 0.15: J1.2 11.08,22.77 11.37,22.77 12.27,23.67 13.37,23.67 13.77,23.27 14.97,23.27 16.12,22.12 16.12,19.12 15.87,18.87 15.87,13.87 16.17,13.57 16.17,9.57 15.17,8.57 15.17,7.77 16.9,6.04 22.89,6.04 23.26,5.67 26.57,5.67 27.17,5.07 31.87,5.07 32.07,5.27 35.74,5.27 Q3.1 36.51,5.84 36.93,5.42 R2_EP_DR.2
GND  (via drill 0.2 pad 0.2, 0.3 pad 0.2)
  Top 0.15: R2_EP_DR.1 35.43,4.18 SW_ENT.1 | IC9.B1 IC9.C1 IC9.C2 IC9.C3 | C15.2 26.56,22.74 C16.2 | J2.3 J2.5 37.19,19.47 36.77,19.47 | U3.6 40.71,10.68 U3.9 | U1.P$B7 25.53,18.81 U1.P$74 | U1.P$F23 27.63,19.06 U1.P$78
  Bottom 0.15: v18.57,6.87 18.57,6.47 v16.27,4.17 | U1.P$B7 24.03,19.66 U1.P$75
  other vias: 24.03,20.31
  pour Top: -15.03,-15.11 49.58,-15.11 49.58,43.15 -15.03,43.15
  pour Route2: -5.47,40.71 -5.45,40.69 -5.45,-17.4 -5.1,-17.75 53.94,-17.75 54.69,-17 54.69,40.79 -3.85,40.79 -3.87,40.81 -4.63,41.56 -5.19,41.01 -5.21,40.99 -5.75,40.99
  pour Bottom: -1.65,45.65 -1.67,45.63 -1.75,45.54 -1.75,-2.7 -1.2,-3.25 57.1,-3.25 57.09,-3.25 57.09,45.64 57.04,45.69 -1.65,45.69
IMU_INT1  (via drill 0.35 pad 0.2)
  Top 0.15: U1.P$N1 21.87,16.9 21.87,16.47 21.67,16.27 18.87,16.27 18.57,15.97 17.17,17.37 17.17,20.47 17.57,20.87 17.57,21.97 v17.77,22.17 | v15.27,25.07 13.37,26.97 IC3.5
  Bottom 0.15: v17.77,22.17 17.57,22.37 17.57,22.47 15.27,24.77 v15.27,25.07
IMU_INT2  (via drill 0.2 pad 0.2, 0.35 pad 0.2)
  Top 0.15: v16.17,25.37 13.87,27.67 IC3.6
  Bottom 0.15: U1.P$P2 22.58,17.06 21.87,17.77 21.87,19.07 19.97,20.97 19.67,20.97 17.17,23.47 17.17,24.37 v16.17,25.37
  other vias: 22.78,17.06
LX1
  Top 0.15: L7.1 4.98,26.67 IC9.B3 IC9.B2
LX2
  Top 0.15: L7.2 2.12,26.47 4.18,28.53 IC9.D3 IC9.D2
N$1  (via drill 0.3)
  Top 0.15: v4.37,30.03 4.37,29.72 4.27,29.61 4.27,29.58 IC9.D1 | v4.37,30.97 4.56,31.16 R4.2
  Bottom 0.15: v4.37,30.97 v4.37,30.03
N$2
  Top 0.15: IC1.D1 9.31,31.87 8.85,31.41 R9.2
N$3  (via drill 0.3)
  Top 0.15: IC9.E1 v3.78,30.06 v3.77,30.07 | R2.2 2.78,31.06 v2.77,31.07
  Bottom 0.15: v2.77,31.07 v3.77,30.07
N$4  (via drill 0.35 pad 0.2)
  Top 0.15: C18.2 20.49,16.86 20.64,17 X2.2 | X2.2 20.54,17 v19.51,18.03 | X2.2 | U1.P$F2 22.46,19.06 22.29,19.23 22.13,19.23 21.47,18.57 20.39,18.57 v20.31,18.65
  Bottom 0.15: v20.31,18.65 19.69,18.03 v19.51,18.03
N$5
  Top 0.15: 20.87,19.55 X2.1 | U1.P$D2 22.73,19.51 20.92,19.51 20.87,19.55 | C17.2 20.73,19.69 20.87,19.55
N$6  (via drill 0.35 pad 0.3)
  Top 0.15: U1.P$A23 28.66,20.81 29.92,22.07 29.92,23.92 v30.47,24.47 | X1.3 33.17,23.34 33.17,23.77 v32.87,24.07 32.62,24.07 32.34,24.35 C2.1
  Bottom 0.15: v30.47,24.47 30.87,24.47 31.27,24.07 v32.87,24.07
N$7
  Top 0.15: U1.P$B24 29.44,20.97 30.5,20.97 X1.1 30.9,20.45 C1.1
N$8
  Top 0.15: L3.1 L2.2
N$9
  Top 0.15: D4.2 17.45,12.34 C2-EP-DR.1 19.4,10.42 D2.1
N$10
  Top 0.15: C2-EP-DR.2 19.63,11.19 21.45,11.19 22.19,10.45 D5.2 25.69,10.45 27.07,9.07 27.07,6.57 27.61,6.03 L5.1 33.05,6.03 34.96,7.94 Q3.3
N$11
  Top 0.15: C3.1 29.62,17.98 L1.1 29.6,18.04 28.97,18.67 28.39,18.67 U1.P$H23
N$14
  Top 0.15: U1.P$N24 29.17,16.92 29.17,16.57 29.46,16.28 C9.1
N$15
  Top 0.15: J1.4 11.03,21.52 13.45,21.52 EPD_C2.2
N$16  (via drill 0.35 pad 0.3)
  Top 0.15: L1.2 30.78,18.17 C4.1 | C4.1 32.43,17.97 C22.1 | C4.1 32.87,18.17 v32.97,18.27 | v38.57,27.17 38.57,29.27 39.37,30.17 ANT1.1
  Bottom 0.15: v32.97,18.27 33.77,19.07 33.77,25.17 34.47,25.87 37.27,25.87 v38.57,27.17
N$17
  Top 0.15: C13.1 U1.P$A18
N$18
  Top 0.15: J1.5 13.19,21.12 EPD_C1.2
N$19
  Top 0.15: C32.2 4.15,8 IC2.A2
N$20  (via drill 0.3)
  Top 0.15: v23.17,12.37 23.36,12.56 C20.1 | U1.P$AC5 23.43,14.71 22.21,14.71 v21.87,14.37
  Bottom 0.15: v21.87,14.37 21.97,14.37 22.57,13.77 22.77,13.77 23.17,13.37 v23.17,12.37
N$21
  Top 0.15: R1_USB.2 24.26,27.28 J4.A5
N$22
  Top 0.15: R1_EP_DR.1 37.78,2.82 R_TYPE_SEL.2 39.59,2.79 SJ1.2
N$26
  Top 0.15: R2_USB.1 21.26,27.11 J4.B5
N$30
  Top 0.15: J1.18 11.72,14.62 12.67,15.57 12.67,16.09 EPD_C6.2
N$31
  Top 0.15: L2.1 23.7,20.98 U1.P$B3
N$32
  Top 0.15: J1.19 12.23,14.12 EPD_C7.2
N$33
  Top 0.15: J1.20 11.03,13.72 13.1,13.72 13.9,14.52 EPD_C8.2
N$35
  Top 0.15: J1.22 11.08,12.47 11.37,12.47 12.16,11.68 EPD_C10.2
N$37
  Top 0.15: J1.24 10.93,10.72 12.85,8.8 EPD_C12.2
N$60  (via drill 0.3 pad 0.3)
  other vias: 39.37,27.17
N$61  (via drill 0.3 pad 0.3)
  other vias: 40.17,27.17
N$62  (via drill 0.3 pad 0.3)
  other vias: 40.87,27.17
N$63  (via drill 0.3 pad 0.3)
  other vias: 41.57,27.17
N$64  (via drill 0.3 pad 0.3)
  other vias: 42.37,27.17
N$65  (via drill 0.3 pad 0.3)
  other vias: 43.17,27.17
N$66  (via drill 0.3 pad 0.3)
  other vias: 43.97,27.17
N$67  (via drill 0.3 pad 0.3)
  other vias: 44.77,27.17
N$68  (via drill 0.3 pad 0.3)
  other vias: 45.47,27.17
N$69  (via drill 0.3 pad 0.3)
  other vias: 37.77,27.17
N$70  (via drill 0.3 pad 0.3)
  other vias: 36.97,27.17
N$71  (via drill 0.3 pad 0.3)
  other vias: 36.17,27.17
N$72  (via drill 0.3 pad 0.3)
  other vias: 35.37,27.17
N$73  (via drill 0.3 pad 0.3)
  other vias: 34.57,27.17
N$74  (via drill 0.3 pad 0.3)
  other vias: 33.77,27.17
N$75  (via drill 0.3 pad 0.3)
  other vias: 33.07,27.17
N$76  (via drill 0.3 pad 0.3)
  other vias: 33.07,27.87
N$77  (via drill 0.3 pad 0.3)
  other vias: 33.07,28.57
N$78  (via drill 0.3 pad 0.3)
  other vias: 33.07,29.37
N$79  (via drill 0.3 pad 0.3)
  other vias: 33.07,30.07
N$80  (via drill 0.3 pad 0.3)
  other vias: 33.07,30.87
N$81  (via drill 0.3 pad 0.3)
  other vias: 33.07,31.47
N$82  (via drill 0.3 pad 0.3)
  other vias: 33.07,32.87
N$83  (via drill 0.3 pad 0.3)
  other vias: 33.07,33.57
N$84  (via drill 0.3 pad 0.3)
  other vias: 33.07,34.27
N$85  (via drill 0.3 pad 0.3)
  other vias: 33.07,32.17
OUT+
  Top 0.15: TP_OP.TP 4.65,7.11 IC2.A3
OUT-
  Top 0.15: IC2.C3 5.07,5.24 TP_ON.TP
P0.13/1.5D
  Top 0.15: SW_UP.2 20.62,4.3 C30.2 19.5,3.39 18.95,2.84 R5.1
P0.14/1.5D
  Top 0.15: R8.1 30.49,3.84 C31.2 31.62,3.98 31.81,4.19 32.48,4.19 SW_ENT.2
P1.01/1.6C
  Top 0.15: R_PWR_EPD.1 34.68,9.35 Q1.1
P1.02/1.6C
  Top 0.15: SW_DN.2 10.58,4.29 C29.2 10.02,5.36 R7.1
PMIC_INT  (via drill 0.2, 0.3)
  Top 0.15: v9.07,34.17 9.31,33.93 IC1.A1
  Bottom 0.15: U1.P$T2 22.48,16.56 21.97,17.07 21.77,17.07 21.47,17.37 21.47,18.57 19.37,20.67 18.27,20.67 15.37,23.57 15.27,23.57 14.27,24.57 14.27,25.07 15.22,26.02 15.72,26.02 16.07,26.37 16.07,31.47 13.77,33.77 12.67,33.77 12.57,33.87 9.37,33.87 v9.07,34.17
  other vias: 22.78,16.56
PREVGH  (via drill 0.3)
  Top 0.15: v22.77,8.47 22.77,7.27 23.09,6.95 D5.1 | J1.21 12.52,13.12 | v12.87,12.77 12.52,13.12 | 12.52,13.12 13.97,13.12 EPD_C9.2
  Bottom 0.15: v12.87,12.77 17.17,8.47 v22.77,8.47
PREVGL  (via drill 0.3)
  Top 0.15: EPD_C11.2 13.76,10.18 v13.07,10.87 12.47,10.87 11.37,11.97 11.08,11.97 J1.23 | D2.2 20.79,6.74 v19.87,6.74
  Bottom 0.15: v13.07,10.87 13.87,10.87 16.87,7.87 18.74,7.87 v19.87,6.74
RESE  (via drill 0.3)
  Top 0.15: J1.3 11.08,22.27 11.37,22.27 11.67,22.57 v12.47,22.57 | v32.67,11.47 32.27,11.87 31.47,11.87 v30.47,12.87 | R1_EP_DR.2 37.78,5.66 Q3.2 36.57,6.87 v35.27,6.87
  Bottom 0.15: v12.47,22.57 14.37,22.57 14.77,22.17 14.77,21.67 15.77,20.67 16.17,20.67 18.87,17.97 18.87,17.47 19.37,16.97 20.77,16.97 21.77,15.97 21.77,15.17 23.27,13.67 29.67,13.67 v30.47,12.87 | v32.67,11.47 32.67,8.07 33.87,6.87 v35.27,6.87
RESET  (via drill 0.2 pad 0.2, 0.35)
  Top 0.15: J2.6 39.26,19.86 40.13,18.99 42.79,18.99 TP_RESET.TP
  Bottom 0.15: J2.6 37.26,19.86 34.67,17.27 32.27,17.27 29.97,14.97 25.67,14.97 25.53,14.83 U1.P$AC13
  other vias: 38.85,19.86 25.53,14.81
SCL/2.4C  (via drill 0.2, 0.3, 0.35, 0.35 pad 0.2)
  Top 0.15: IC1.B1 8.87,33.07 v8.37,33.57 | IC3.12 v13.37,29.97 13.77,30.37 13.77,31.57 15.67,33.47 v16.27,33.47 | U3.7 40.21,13.43 39.57,14.07 v38.37,14.07 | TP_SCL.TP 5.88,31.26 R4.1 | R17.2 6.56,31.31 TP_SCL.TP | v7.97,31.97 7.94,31.94 TP_SCL.TP | v33.07,19.77 33.67,19.17 v33.67,16.77
  Bottom 0.15: v7.97,31.97 8.37,32.37 v8.37,33.57 11.47,33.57 13.77,31.27 13.77,30.27 13.47,29.97 v13.37,29.97 | U1.P$M2 22.78,20.86 21.67,21.97 | 21.67,21.97 21.17,22.47 20.07,22.47 18.17,24.37 18.17,25.47 16.82,26.82 16.82,31.82 16.27,32.37 v16.27,33.47 | 21.67,21.97 21.87,22.17 25.97,22.17 26.47,22.67 27.67,22.67 29.57,20.77 32.07,20.77 v33.07,19.77 | v33.67,16.77 33.67,16.07 32.57,14.97 32.57,13.57 32.87,13.27 35.97,13.27 36.87,14.17 38.27,14.17 v38.37,14.07
  other vias: 22.78,17.56
SCL/2.4C1
  Top 0.15: R3.2 12.79,30.09 12.57,29.87 12.57,29.63 IC3.1
SDA/1.4C  (via drill 0.2 pad 0.3, 0.35)
  Top 0.15: U3.8 39.71,12.43 39.47,12.67 v39.07,12.67
  Bottom 0.15: IC2.B2 4.15,6.95 5.77,8.57 8.77,8.57 10.47,10.27 10.47,11.87 10.27,12.07 12.82,14.62 14.72,14.62 16.57,12.77 18.07,12.77 19.37,11.47 19.37,11.27 20.37,10.27 26.47,10.27 29.37,7.37 31.17,7.37 32.37,6.17 32.37,6.07 36.27,6.07 36.97,6.77 36.97,10.57 v39.07,12.67
  other vias: 4.15,6.16
SDA/2.4C  (via drill 0.3, 0.35 pad 0.2)
  Top 0.15: TP_SDA.TP 3.54,31.71 R2.1 | R18.2 6.57,33.36 | 6.57,33.36 5.19,33.36 TP_SDA.TP | IC1.C1 8.48,32.67 7.41,33.74 7.3,33.74 7.27,33.77 6.98,33.77 6.57,33.36 | TP_SDA.TP 3.8,31.97 v2.47,31.97 | v12.07,28.87 12.84,28.87 IC3.2 | v12.27,25.87 13.87,24.27 v13.87,24.07 | U1.P$L1 22.08,17.81 21.72,18.17 20.07,18.17 19.57,18.67 v19.47,18.67
  Bottom 0.15: v2.47,31.97 2.07,31.57 2.07,30.07 3.17,28.97 3.17,28.17 4.57,26.77 6.17,26.77 6.67,26.27 6.67,26.17 11.57,26.17 | 11.57,26.17 11.97,26.57 11.97,28.77 v12.07,28.87 | 11.57,26.17 11.97,26.17 v12.27,25.87 | v13.87,24.07 13.87,23.87 16.47,21.27 16.87,21.27 v19.47,18.67
SWDCLK  (via drill 0.3)
  Top 0.15: v39.47,21.77 39.47,21.75 J2.4 38.27,20.55 38.27,20.12 38.25,20.1 38.25,19.25 v38.07,19.07 | v42.87,21.17 43.41,21.17 TP_SWDCLK.TP | U1.P$AA24 28.81,15.34 33.15,15.34 33.8,16 35.54,16 v35.57,15.97
  Bottom 0.15: v39.47,21.77 39.91,21.77 40.13,21.99 42.05,21.99 v42.87,21.17 | v35.57,15.97 35.72,15.97 38,18.25 v38.07,19.07
SWDIO  (via drill 0.3, 0.35 pad 0.3)
  Top 0.15: J2.2 39.9,22.4 40.13,22.17 41.97,22.17 v42.77,22.97 44.16,24.36 TP_SWDIO.TP | U1.P$AC24 28.78,14.88 28.87,14.97 32.47,14.97 32.58,14.87 33.78,14.87 v34.03,15.11 | v41.17,17.37 40.37,16.57 37.47,16.57 37.17,16.87 36.67,17.07 v35.57,17.07
  Bottom 0.15: v34.03,15.11 35.07,16.16 35.07,16.87 v35.57,17.07 | v41.17,17.37 43.37,19.57 43.57,19.57 43.77,19.77 43.77,21.47 42.77,22.47 v42.77,22.97
SWO
  Top 0.15: U1.P$AD22 27.76,14.29 27.76,13.66 TP_SWO.TP
VBAT/1.2A
  Top 0.3: TP_VBAT.TP 42.07,6.26 40.97,6.24 C27.2 40.59,8.39 | 40.59,8.39 40.71,8.51 U3.3 | U3.2 40.21,8.76 40.59,8.39
VBAT/2.5C
  Top 0.3: C37.2 10.06,32.67 IC1.C2
VBUS/1.5D  (via drill 0.35)
  Top 0.3: C42.1 14.8,24.41 C43.1 16.11,24.22 D3.5 17.82,24.59 18.16,24.59 18.77,25.2 18.77,26.27 v19.87,27.37 20.37,27.37 20.61,27.61 J4.A9_B4 | v25.37,27.57 25.37,28.97 J4.A4_B9
  Bottom 0.3: v19.87,27.37 22.27,27.37 22.37,27.27 25.07,27.27 v25.37,27.57
VBUS/2.6D  (via drill 0.35 pad 0.2, 0.35 pad 0.3)
  Top 0.3: C38.2 11.24,33.47 10.84,33.87 | U1.P$AD2 22.19,13.72 C21.1 22.19,12.59 v21.77,12.17 | v16.67,18.87 16.77,18.77 16.77,17.07 18.37,15.47 18.37,14.47 18.57,14.27 v18.97,14.27 | v12.97,22.07 13.07,22.17 13.07,22.77 v12.67,23.17 | v13.57,32.77 12.47,33.87 10.84,33.87 | IC1.A2 10.11,33.87 10.84,33.87
  Bottom 0.3: v16.67,18.87 15.77,19.77 13.57,19.77 12.97,20.37 v12.97,22.07 | v13.57,32.77 13.57,32.37 15.67,30.27 15.67,26.87 14.77,26.87 12.67,24.77 v12.67,23.17 | v21.77,12.17 21.27,12.17 20.17,13.27 19.97,13.27 v18.97,14.27
VREG  (via drill 0.3, 0.35 pad 0.2)
  Top 0.3: IC9.A3 IC9.A2 IC9.A1 5.38,29.88 v5.77,30.27 | C39.1 11.13,32.32 v10.62,32.82 10.38,33.07 IC1.B2 | TP_VREG.TP 8.5,28.11 7.72,28.88 C24.2 8.17,29.57 v8.17,29.67 8.07,29.77 7.09,29.77 6.95,29.63 C23.2
  Bottom 0.3: v8.17,29.67 8.17,30.27 | 8.17,30.27 8.17,30.37 v10.62,32.82 | v5.77,30.27 8.17,30.27
(copper drawn outside any net)
  shapes: Bottom area x1, Top area x1

## Text on the board
tPlace: SDA | SCL | 3V3 | VREG | SWDIO | SWDCLK | RESET | 3V3 | SWO | GND | OP | VBAT | GND | ON